# Altium PCB DE-080717.PcbDoc
Units mil, origin at the board's own origin, x right, y up, seen from the top; angles counter-clockwise.
Board outline 2085 x 885 mil, 2 copper layers (Top Layer, Bottom Layer); 26 components, 25 nets, 105 pads, 0 vias.
Unrouted connection lines stored in the file: 7.
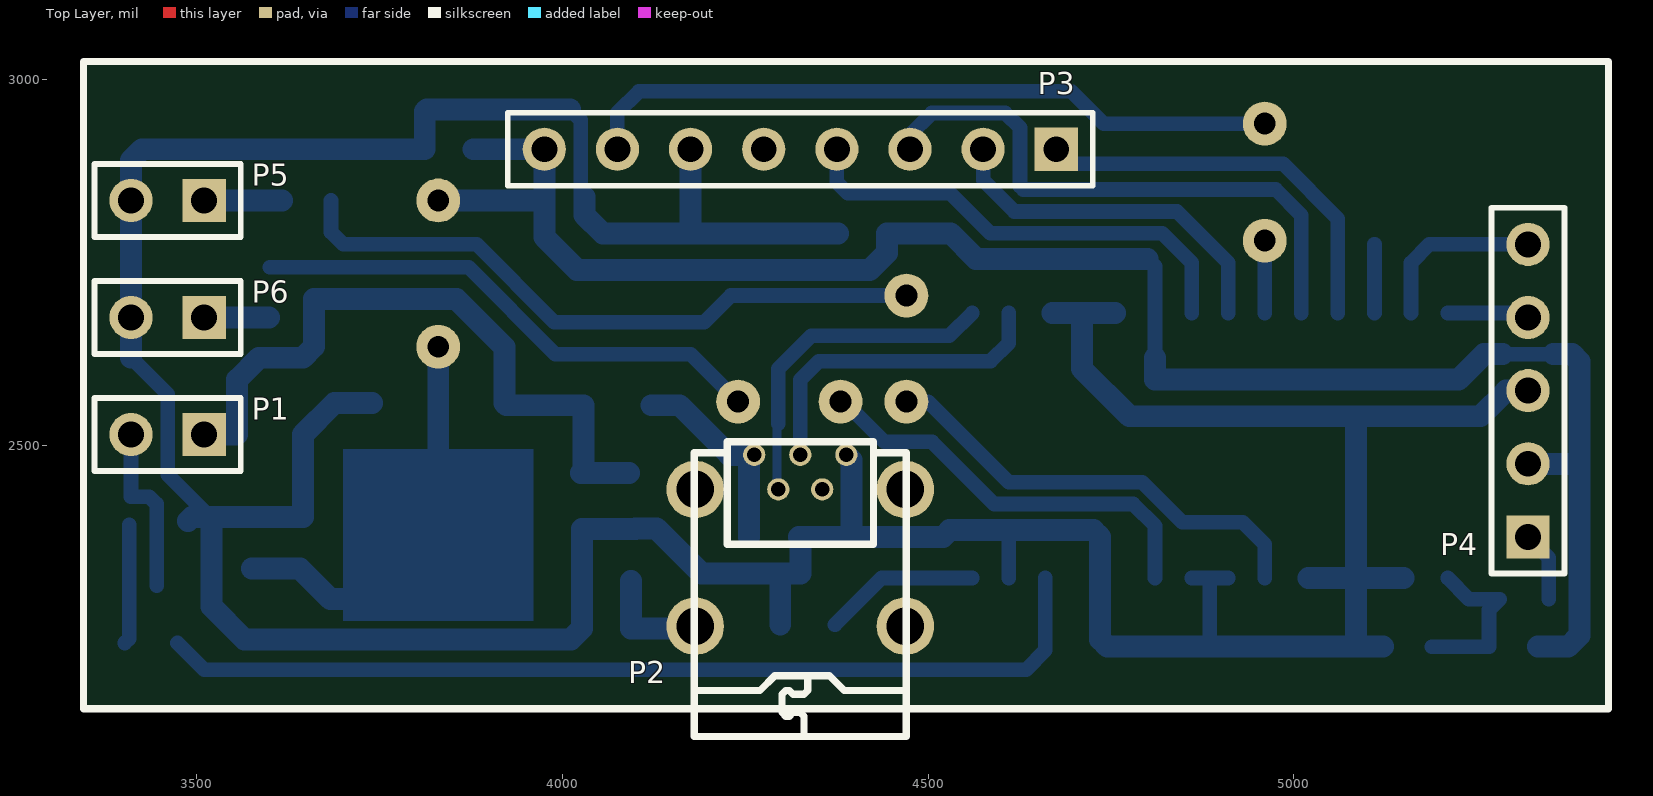
[diagram p0: Top Layer view]
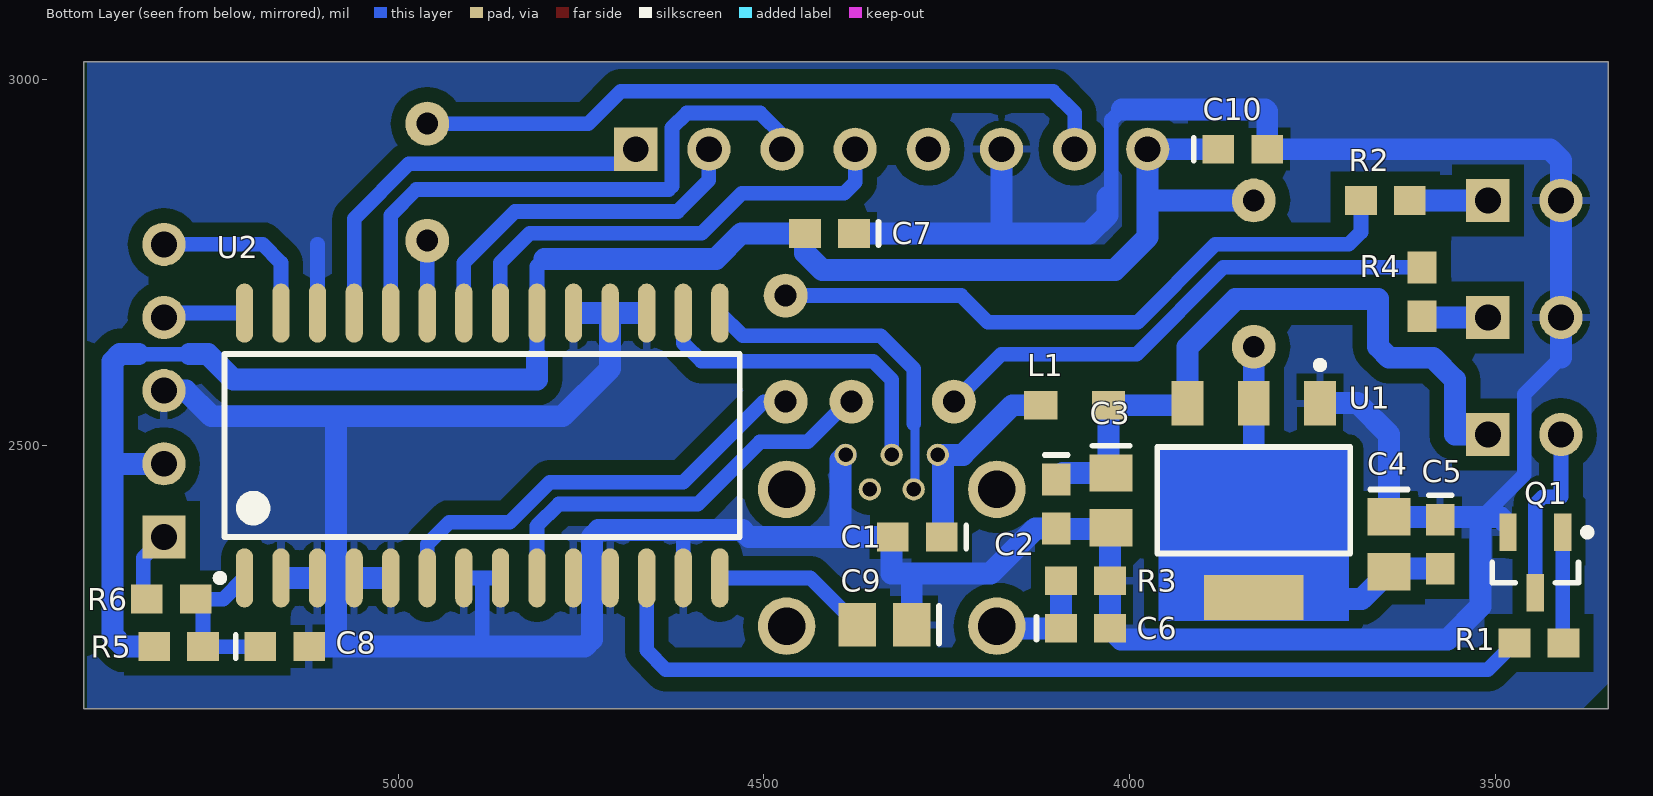
[diagram p1: Bottom Layer view, seen from below]

## Layer stack, top to bottom
Top Solder: solder mask 0.4, Solder Resist, Dk 3.5
Top Layer: signal copper 1.4
Dielectric 1: dielectric 12.6, FR-4, Dk 4.8
Bottom Layer: signal copper 1.4
Bottom Solder: solder mask 0.4, Solder Resist, Dk 3.5

## Board outline
3345,2140 5430,2140 5430,3025 3345,3025

## Design rules (kind name [scope] priority, off if disabled: settings)
Clearance [All] p1: gap=10 except(20: Arc-Poly Track-Poly SMDPad-Poly THPad-Poly Via-Poly Fill-Poly Poly-Poly)
PolygonConnect [All] p1: connectstyle=Relief reliefconductorwidth=10 reliefentries=4 polygonreliefangle="90 Angle" airgapwidth=10
RoutingVias [All] p1: holewidth=20 width=50 viastyle="Through Hole" minholewidth=10 minwidth=50 maxholewidth=40 maxwidth=50
SolderMaskExpansion [All] p1: expansion=4
Width [All] p1: maxlimit=2000 minlimit=10 preferedwidth=30
30 further rules are at their usual default settings.

## Components (designator, comment, footprint, x,y, rotation, side; value= is the part's Value field where it differs from the comment)
C1 "10nF" 0603 4290,2375 r0 bottom
C2 "10nF" 0603 4100,2420 r270 bottom
C3 "10uF" 0805 4025,2425 r270 bottom
C4 "10uF" 0805 3645,2365 r270 bottom
C5 "100nF" 0603 3575,2365 r270 bottom
C6 "10nF" 0603 4060,2250 r180 bottom
C7 "100nF" 0603 4410,2790 r0 bottom
C8 "100nF" 0603 5155,2225 r180 bottom
C9 "470nF" 0805 4335,2255 r0 bottom
C10 "100nF" 0603 3845,2905 r180 bottom
L1 "10uH" SMD-0805 4075,2555 r180 bottom
P1 "BUZZER" HDR1X2 3510,2515 r180 top
P2 "USB" "USB mini B" 4325,2440 r0 top
P3 "RC522 CARD RW" HDR1X8 4675,2905 r180 top
P4 "PICKIT3_ICSP" HDR1X5 5320,2375 r90 top
P5 "BLUE LED" HDR1X2 3510,2835 r180 top
P6 "RED LED" HDR1X2 3510,2675 r180 top
Q1 "MMBT2222" SOT23_N 3445,2340 r270 bottom
R1 "1K" ERA-0603 3440,2230 r180 bottom
R2 "100R" ERA-0603 3650,2835 r180 bottom
R3 "100K" ERA-0603 4060,2315 r0 bottom
R4 "330R" ERA-0603 3600,2710 r270 bottom
R5 "10K" ERA-0603 5300,2225 r0 bottom
R6 "100R" ERA-0603 5310,2290 r0 bottom
U1 "REG1117-3.3" ZZ311 3830,2425 r0 bottom
U2 "PIC18F25K50-I/SO" MCHP-SOIC-SO28_N 4885,2500 r90 bottom

## Footprints (in the part's own frame and the unit in brackets; to place one, negate y for a bottom-side part, rotate by r counter-clockwise, add the part's x,y. Pads: shape width x height; smd on the part's side, far side on the other; paste and mask are expansions set on the pad)
0603 [mm] "Chip Capacitor; Body 1.6 x 0.8 mm (LxW typ)"
  rect 1.1x1 smd: 1(-0.85,0) 2(0.85,0)
  silkscreen extent -1.7,-0.4 -1.7,0.4
0805 [mm] "Chip Capacitor; Body 2.0 x 1.2 mm (LxW typ)"
  rect 1.3x1.5 smd: 1(-0.95,0) 2(0.95,0)
  silkscreen extent -1.9,-0.65 -1.9,0.65
ERA-0603 [mm] "Chip Resistor; Body 1.6 x 0.8 mm (LxW typ)"
  rect 1.1x1 smd: 1(-0.85,0) 2(0.85,0)
HDR1X2 [mm] "Connector; Header; 2 Position"
  rect 1.5x1.5 hole 0.9: 1(0,0)
  round 1.5 hole 0.9: 2(2.54,0)
  silkscreen extent -1.27,-1.27 3.81,1.27
HDR1X5 [mm] "Connector; Header; 5 Position"
  rect 1.5x1.5 hole 0.9: 1(0,0)
  round 1.5 hole 0.9: 2(2.54,0) 3(5.08,0) 4(7.62,0) 5(10.16,0)
  silkscreen extent -1.27,-1.27 11.43,1.27
HDR1X8 [mm] "Connector; Header; 8 Position"
  rect 1.5x1.5 hole 0.9: 1(0,0)
  round 1.5 hole 0.9: 2(2.54,0) 3(5.08,0) 4(7.62,0) 5(10.16,0) 6(12.7,0) 7(15.24,0) 8(17.78,0)
  silkscreen extent -1.27,-1.27 19.05,1.27
MCHP-SOIC-SO28_N [mm] "SOIC, 28-Leads, Body 17.9x7.5mm, Pitch 1.27mm, IPC Medium Density"
  oval 2.05x0.6 smd: 1(-4.6,8.255) 2(-4.6,6.985) 3(-4.6,5.715) 4(-4.6,4.445) 5(-4.6,3.175) 6(-4.6,1.905) 7(-4.6,0.635) 8(-4.6,-0.635) 9(-4.6,-1.905) 10(-4.6,-3.175) 11(-4.6,-4.445) 12(-4.6,-5.715) 13(-4.6,-6.985) 14(-4.6,-8.255) 15(4.6,-8.255) 16(4.6,-6.985) 17(4.6,-5.715) 18(4.6,-4.445) 19(4.6,-3.175) 20(4.6,-1.905) 21(4.6,-0.635) 22(4.6,0.635) 23(4.6,1.905) 24(4.6,3.175) 25(4.6,4.445) 26(4.6,5.715) 27(4.6,6.985) 28(4.6,8.255)
  silkscreen extent -4.72,-8.95 3.18,9.23, body extent -3.75,-8.95 3.75,8.95, height 2.65
SMD-0805 [mm] "Chip Inductor, 2-Leads, Body 2.0x1.2mm"
  rect 1.15x1 smd: 1(-1.175,0) 2(1.175,0)
  body extent -1,-0.6 1,0.6, height 0.89
SOT23_N [mm] "SOT23, 3-Leads, Body 2.9x1.3mm, Pitch 0.95mm, Lead Span 2.3mm, IPC Medium Density"
  rect 1.3x0.6 smd: 1(-1.05,0.95) 2(-1.05,-0.95) 3(1.05,0)
  silkscreen extent -1.17,-1.5 0.7,1.92, body extent -0.7,-1.5 0.7,1.5, height 1.1
"USB mini B" [mm] "PCB USB troughole connector, type B, mini"
  round 0.771 hole 0.5: 1(-1.6,1.2) 2(-0.762,0) 3(0,1.2) 4(0.762,0) 5(1.6,1.2)
  round 2 hole 1.3: 6(-3.65,-4.75) 6(-3.65,0) 6(3.65,-4.75) 6(3.65,0)
  silkscreen extent -3.68,-8.58 3.68,1.65, body extent -3.68,-8.64 3.68,1.27, height 4
ZZ311 [mm] "SOT-223/SC-73; 4 Leads; Body 6.7 x 7.3 mm, inc. leads (LxW max)"
  rect 1.1x1.55 smd: 1(-2.3,-3.375) 2(0,-3.375) 3(2.3,-3.375)
  rect 3.45x1.55 smd: 4(0,3.375)
  silkscreen extent -3.35,-4.82 3.35,1.85

## Part data
C1 C2 C5 C6 C7 C8 C10: library part C0603, "Ceramic Chip Capacitor - Standard"
C3 C4 C9: library part C0805, "Ceramic Chip Capacitor - Standard"
L1: library part 744790282, "SMD-Multilayer Inductor WE-MI, L = 8.20 µH"
P1 P5 P6: library part "Header 2", "Header, 2-Pin"
P2: library part "USB mini B", "USB connector B mini"
P3: library part "Header 8", "Header, 8-Pin"
P4: library part "Header 5", "Header, 5-Pin"
Q1: library part BC817, "NPN General-purpose Transistor"
R1 R2 R3 R4 R5 R6: library part ERAV, "Metal Film Thermosensitive Chip Resistor, 0.56 Ohm to 10k Ohm Range, 5% Tolerance, 0603 Size, 0.063 W"
U1: "800mA and 1A Low Dropout Positive Regulator 2.85V, 3.3V, 5V, and Adjustable"
U2: "Low-Power, High-Performance Microcontroller with XLP Technology, 48 MHz, 24 I/O, -40 to 85 degC, 28-pin SOIC (SO28), Tube"

## Free pads (board coordinates)
  round 60 hole 30: 2(4380,2560) 3(4470,2560) 4(4240,2560) 5(4470,2705) 7(4960,2780) 8(4960,2940) 9(3830,2635) 9(3830,2835)

## Nets (pads, with @x,y where several pads share a name; then routed paths per layer and width w, separated by ;. In a path a pad name is that pad's centre, name@x,y a point inside that pad or via, vN(x,y) a via of type N, cw(c..) or ccw(c..) an arc to the next point about the centre after c; other vN are vias at no path point)
3V3: C4.2 C5.2 C7.2 C10.1 P3.8 P4.2 pad.9 R5.2 U1.2 U1.4 U2.20 | length 3142.5
  Bottom Layer w20: 4800,2755 4810,2745 U2.20 4810,2620 ; 5285,2625 5355,2625
  Bottom Layer w30: C5.2 3641.06,2331.54 C4.2 3682.6,2290 3827.87,2290 U1.4 U1.2 pad.9@3830,2635 ; pad.9@3830,2835 3970,2835 ; C10.1 P3.8 3975,2785 4020,2740 4420,2740 4443.46,2763.46 C7.2 4530.5,2790 4565.5,2755 4800,2755 ; 4810,2620 4810,2590 5225,2590 5260,2625 5285,2625 ; P4.2 5390,2475 ; R5.2 5375,2225 5390.12,2240.12 5390.12,2434.88 5390.12,2614.88 5380,2625 5355,2625
5V: C2.1 C3.1 L1.2 P1.1 U1.3 | length 942.5
  Bottom Layer w30: P1.1 3555,2515 3555,2590 3585,2620 3645,2620 3660,2635 3660,2700 3855,2700 3920.55,2634.45 U1.3 3923.43,2555 L1.2 4028.74,2466.14 C3.1 C2.1@4091.06,2462.4
BUZZER: R1.1 U2.12 | length 1311.4
  Bottom Layer w20: R1.1 3509.84,2193.62 4633.62,2193.62 4660,2220 U2.12
ICSP_PGC: P4.5 U2.27 | length 239.3
  Bottom Layer w20: U2.27 5160,2750 5185,2775 P4.5
ICSP_PGD: P4.4 U2.28 | length 103.9
  Bottom Layer w20: U2.28 P4.4@5313.9,2681.1
ICSP_VPP: C8.1 R5.1 R6.1 U2.1 | length 232.8
  Bottom Layer w20: C8.1 R5.1 5266.54,2275 5281.54,2290 5238.9,2290 U2.1
LED_BLUE: pad.3 pad.5 R2.1 U2.6 | length 1512.8
  Bottom Layer w20: R2.1 3683.46,2791.54 3700,2775 3882.43,2775 3988.71,2668.71 4193.71,2668.71 4230,2705 pad.5 ; pad.3 4500,2560 4610,2450 4792.43,2450 4847.43,2395 4930,2395 4960,2365 U2.6
LED_RED: pad.2 pad.4 R4.1 U2.9 | length 1287.5
  Bottom Layer w20: R4.1 3871.54,2743.46 3990,2625 4175,2625 pad.4 ; pad.2 4385,2560 4440,2505 4505,2505 4590,2420 4780,2420 4810,2390 U2.9
NetC1_1: C1.1 L1.1 P2.1 | length 284
  Bottom Layer w30: L1.1 4160,2555 4227.76,2487.24 P2.1 4254.81,2480.05 C1.1@4254.81,2375
NetC6_1: C6.1 P2.6 R3.2 | length 149.8
  Bottom Layer w30: R3.2 C6.1 P2.6@4178.31,2250
NetC9_2: C9.2 U2.14 | length 214.1
  Bottom Layer w20: C9.2 4436.3,2318.9 U2.14
NetP1_2: P1.2 Q1.3 | length 235.5
  Bottom Layer w20: P1.2 3410,2430 3435,2430 3445,2420 Q1.3@3445,2308.66
NetP4_1: P4.1 R6.2 | length 96.8
  Bottom Layer w20: P4.1 5348.46,2346.54 R6.2@5348.46,2290
NetP5_1: P5.1 R2.2 | length 106.5
  Bottom Layer w30: P5.1 R2.2
NetP6_1: P6.1 R4.2 | length 88.5
  Bottom Layer w30: P6.1 R4.2@3598.46,2675
NetQ1_1: Q1.1 R1.2 | length 163.8
  Bottom Layer w20: R1.2@3401.54,2230 3407.6,2236.06 Q1.1@3407.6,2391.34
RC522_CS: P3.1 U2.25 | length 553.2
  Bottom Layer w20: P3.1 4685,2895 4690,2895 4700,2885 4985,2885 5060,2810 U2.25
RC522_IRQ: P3.5
RC522_RST: P3.7 pad.7 pad.8 U2.23 | length 1064.6
  Bottom Layer w20: P3.7 4075,2955 4104.53,2984.53 4695.47,2984.53 4740,2940 pad.8 ; U2.23 pad.7
RC522_SCK: P3.2 U2.22 | length 493
  Bottom Layer w20: P3.2 4575,2862.57 4617.57,2820 4840,2820 4910,2750 U2.22
RC522_SDI: P3.4 U2.21 | length 644.5
  Bottom Layer w20: P3.4 4375,2860 4390,2845 4530,2845 4585,2790 4820,2790 4860,2750 U2.21
RC522_SDO: P3.3 U2.24 | length 805.8
  Bottom Layer w20: P3.3 4475,2925 4504.53,2954.53 4605.47,2954.53 4625.47,2934.53 4625.47,2854.53 4630,2850 4975,2850 5010,2815 U2.24
USB_D+: P2.3 U2.16 | length 449.6
  Bottom Layer w20: P2.3 4325,2590 4350,2615 4585,2615 4610,2640 U2.16
USB_D-: P2.2 U2.15 | length 462.3
  Bottom Layer w12: P2.2@4293.19,2440 4293.19,2528.19 4295,2530
  Bottom Layer w20: 4295,2530 4295,2605 4340,2650 4528.9,2650 U2.15
VSS: C1.2 C2.2 C3.2 C4.1 C5.1 C6.2 C7.1 C8.2 C9.1 C10.2 P2.5 P3.6 P4.3 P5.2 P6.2 Q1.2 R3.1 U1.1 U2.2 U2.3 U2.4 U2.5 U2.7 U2.8 U2.10 U2.11 U2.13 U2.17 U2.18 U2.19 U2.26 | length 6075.3
  Bottom Layer w20: 3410,2620 3460,2570 3460,2460 3517.6,2402.4 3520,2402.4 ; 4010.47,2959.53 4025,2945 4025,2845 4030,2840 ; U2.13 4610,2384.25 ; 4885,2225 4885,2315 4881.1,2318.9 U2.8 U2.7 ; U2.26 5110,2775
  Bottom Layer w30: 3410,2620 P6.2 P5.2 3410,2890 3425,2905 C10.2 3811.54,2956.54 3814.53,2959.53 4010.47,2959.53 ; Q1.2@3488.03,2396.97 3493.46,2402.4 3517.6,2402.4 ; U1.1 3687.87,2557.87 3645,2515 C4.1 3520,2402.4 3520,2280 3565,2235 4011.54,2235 C6.2 4026.54,2386.06 C2.2@4099.53,2386.06 ; 4030,2840 4030,2815 4055,2790 C7.1 ; C2.2 4128.46,2386.54 4190,2325 4325,2325 4325,2373.46 C1.2 4395,2375 ; 4175,2790 P3.6 ; C9.1 4297.6,2322.6 ; P2.5 4395.19,2480.05 4395.19,2375.18 4395,2375 ; U2.17@4670,2681.1 U2.18 ; U2.19@4755,2681.1 U2.18 ; U2.5@5020,2318.9 U2.4 5085,2318.9 ; 5085,2230 5085,2318.9 ; 5085,2540 5085,2318.9 ; C8.2 4885,2225 4745,2225 4735,2235 4735,2375 4725.75,2384.25 4610,2384.25 4529.25,2384.25 4520,2375 4395,2375 ; U2.2@5150,2318.9 U2.3 5085,2318.9 ; P4.3 5290,2575 5255,2540 4775,2540 4710,2605 U2.18
pads on no net: P2.4

## Polygon pours and split planes (outlines as drawn)
VSS on Bottom Layer "VSS_L02_P010" (solid, remove dead copper, pour order 10): 3345,3025 5425,3025 5425,2140 3380,2140 3345,2175

## Other copper
Bottom Layer:
  rectangle net 3V3: 3700,2260 3960,2495

## Silkscreen, mask and mechanical layers (free items; w line width, h text height)
Top Overlay:
  the board outline again, w10

## Dimensions
3345,3025 to 5430,3025 on Mechanical 1
5430,2140 to 5430,3025 on Mechanical 1